# Altium PCB wing2.PcbDoc
Units mil, origin at the board's own origin, x right, y up, seen from the top; angles counter-clockwise.
Board outline 1004.25 x 1375 mil, 4 copper layers (Top Layer, Vertical, Horizontal, Bottom Layer), stack 30.634 mil thick; 79 components, 67 nets, 337 pads, 87 vias.
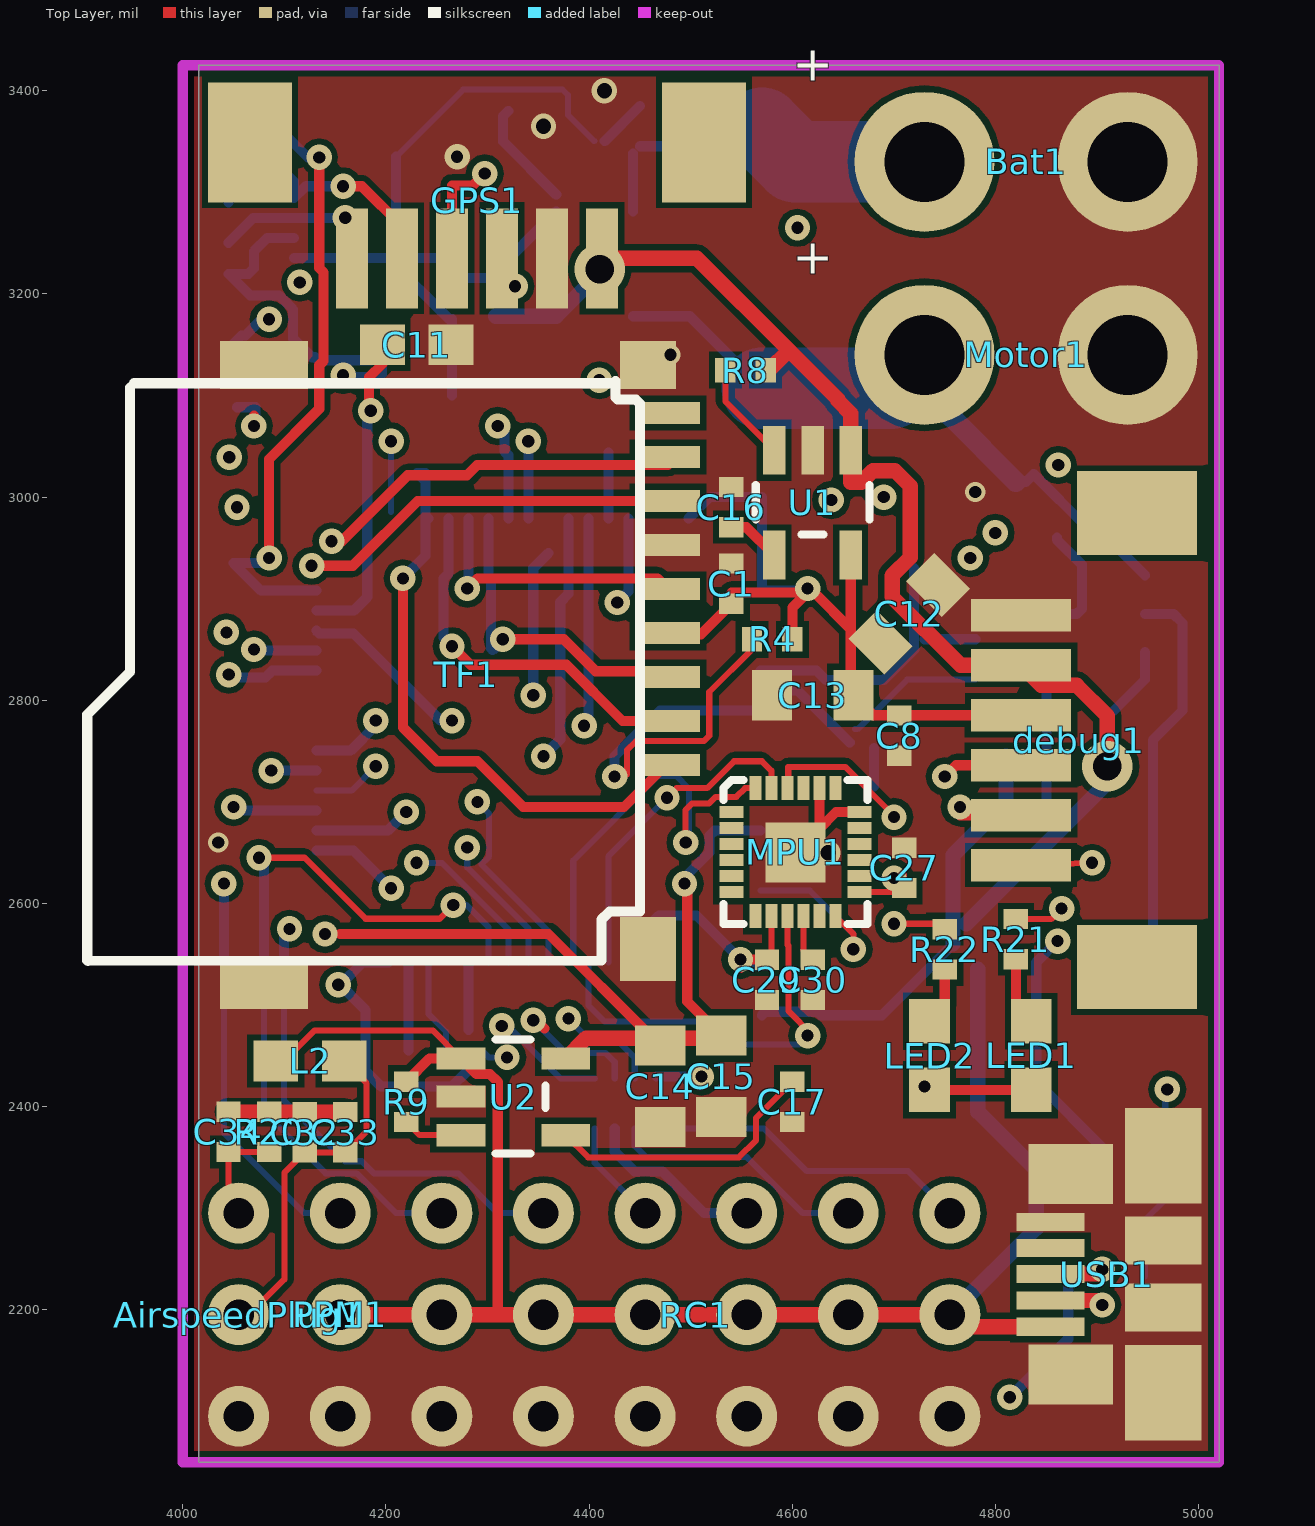
[diagram p0: Top Layer view]
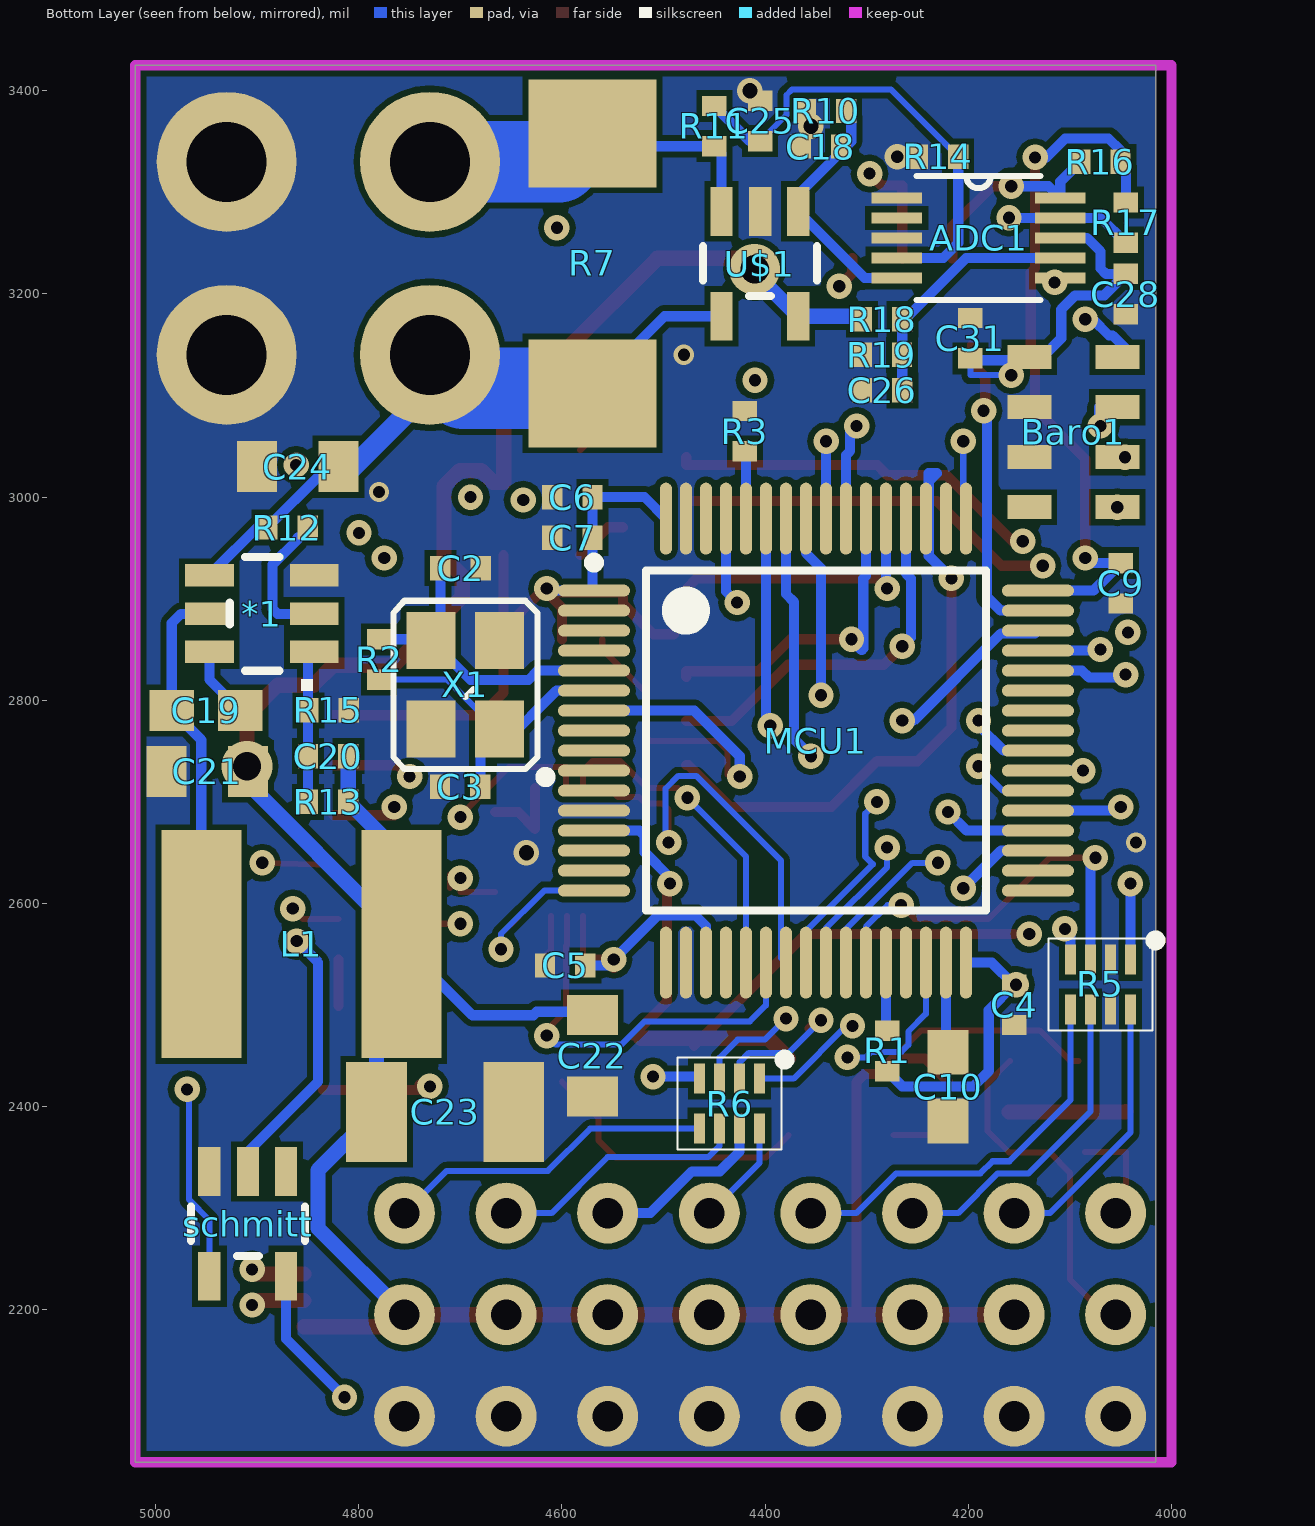
[diagram p1: Bottom Layer view, seen from below]
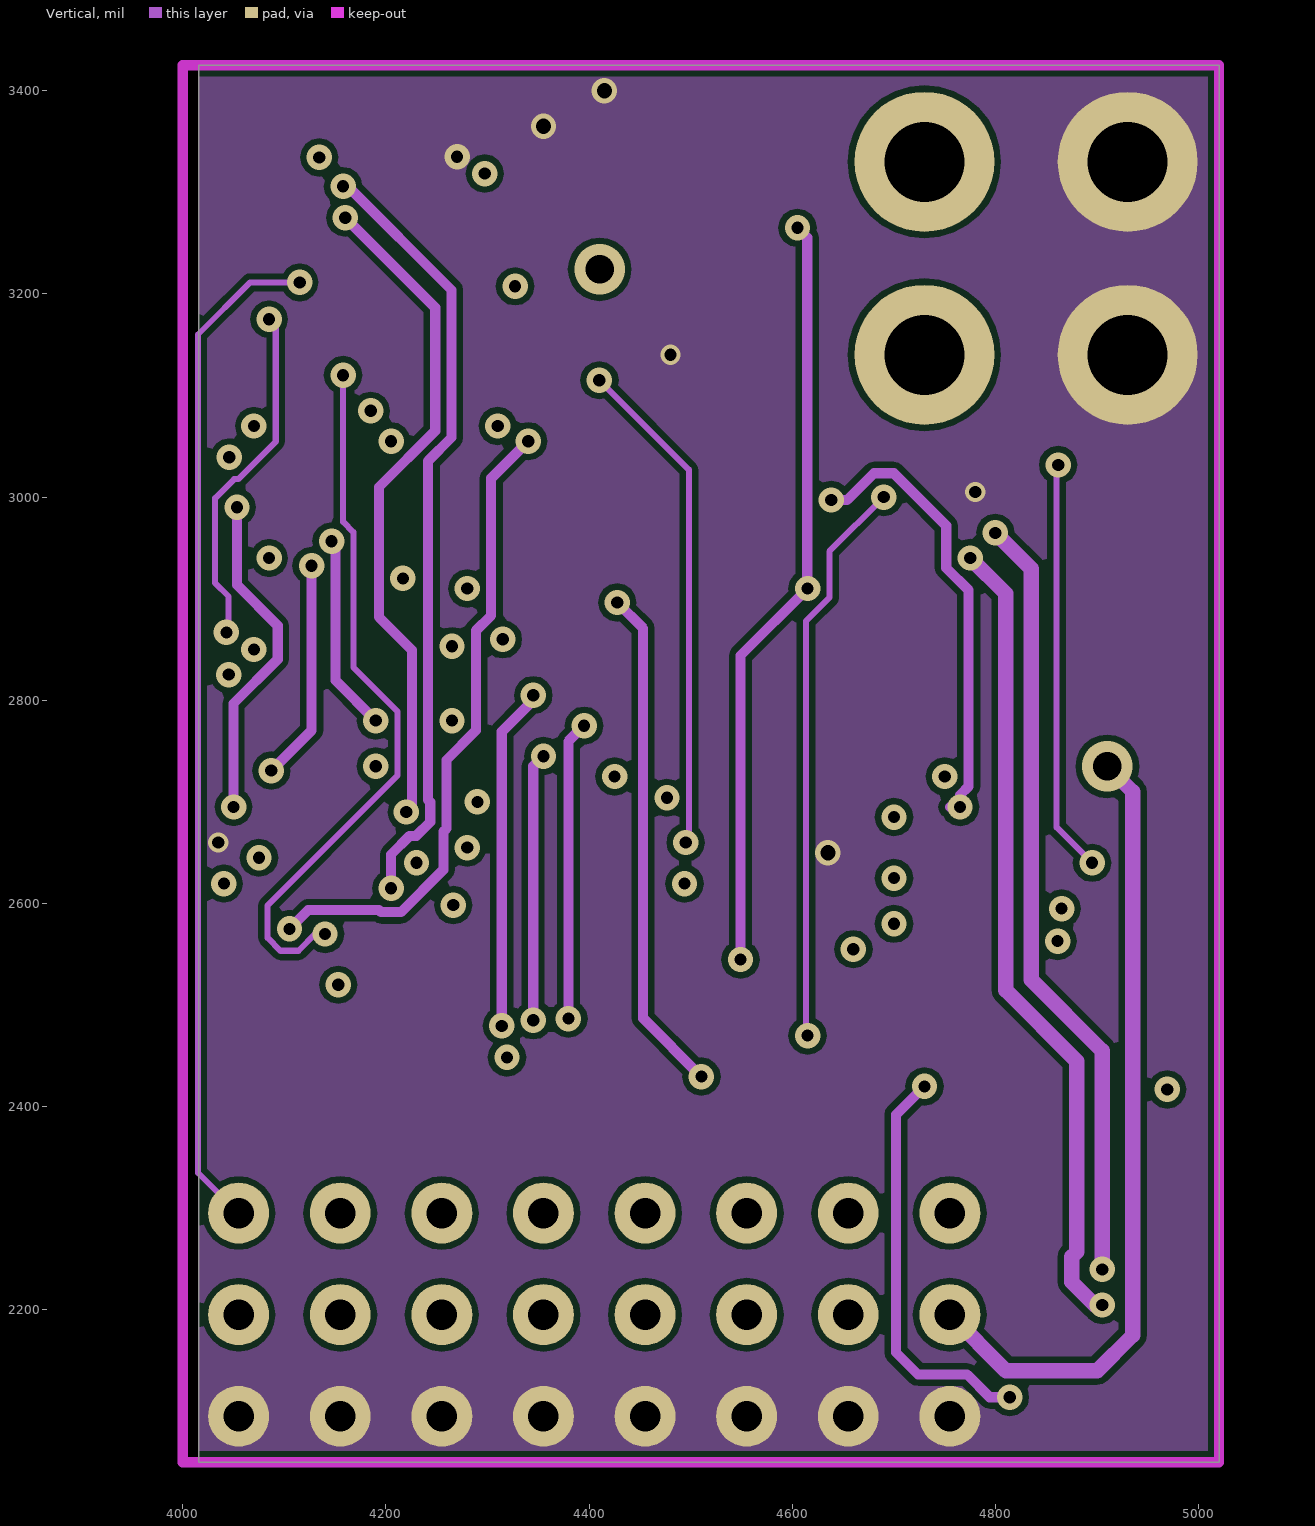
[diagram p2: Vertical]
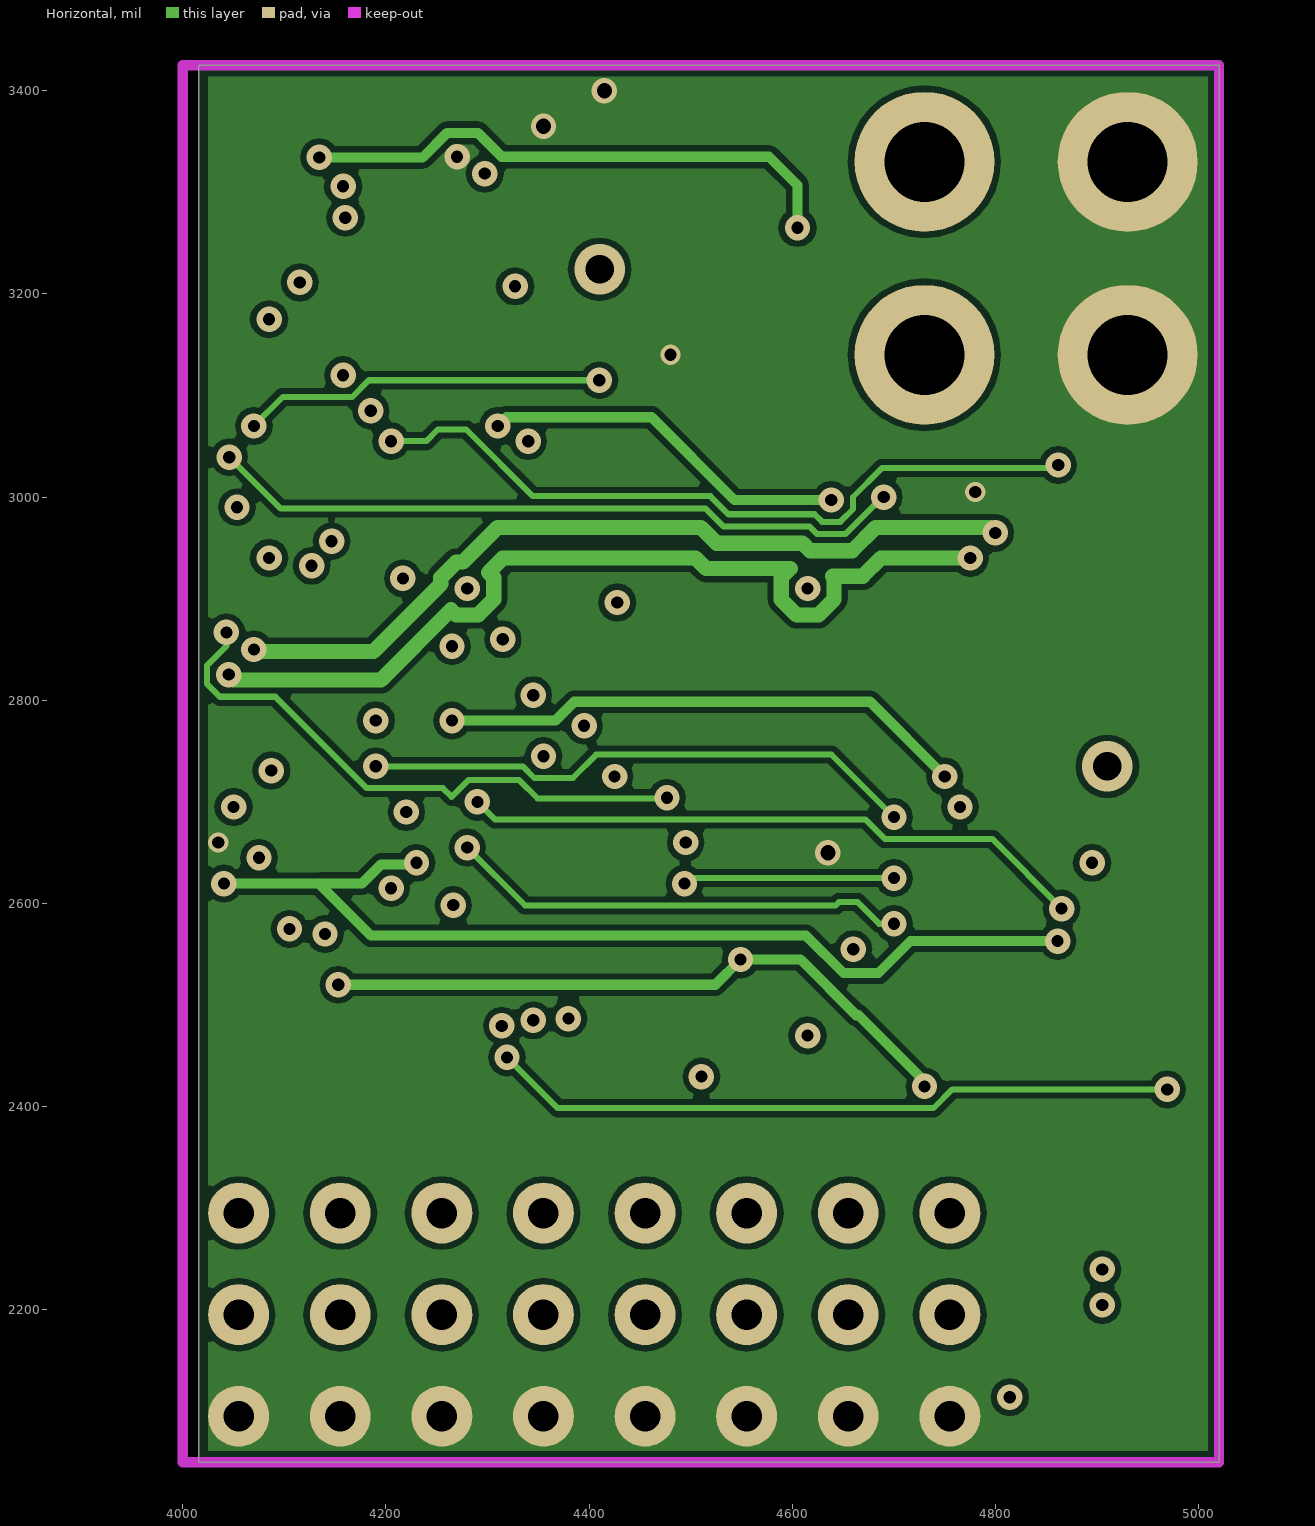
[diagram p3: Horizontal]

## Layer stack, top to bottom
Top Solder: solder mask 0.4, Solder Resist, Dk 3.5
Top Layer: signal copper 1.4
Dielectric 1: core 10, FR-4, Dk 4.2
Vertical: signal copper 1.417
Dielectric 3: prepreg 5, Dk 4.2
Horizontal: signal copper 1.417
Dielectric 2: core 10, Dk 4.2
Bottom Layer: signal copper 1.4
Bottom Solder: solder mask 0.4, Solder Resist, Dk 3.5

## Board outline
4015.75,2050 4015.75,3425 5020,3425 5020,2050

## Design rules (kind name [scope] priority, off if disabled: settings)
Clearance [All] p1: gap=6
DiffPairsRouting [All] p1: maxlimit=10 minlimit=10 mostfreqgap=10 toplayer_minwidth=6 toplayer_maxwidth=15 toplayer_prefwidth=15 midlayer1_minwidth=6 midlayer1_maxwidth=15 midlayer1_prefwidth=15 midlayer2_minwidth=6 midlayer2_maxwidth=15 midlayer2_prefwidth=15 bottomlayer_minwidth=6 bottomlayer_maxwidth=15 bottomlayer_prefwidth=15 maxuncoupledlength=500
MinimumSolderMaskSliver [All] p1 off: minsoldermaskwidth=10
PolygonConnect [All] p1: connectstyle=Direct reliefconductorwidth=10 reliefentries=4 polygonreliefangle="90 Angle" airgapwidth=10
RoomDefinition sensor [InComponentClass('sensor')] p1 off: confinementstyle=ConfineIn formatcopy=TRUE lockcomponents=FALSE outline 0,0 2000,0 2000,1000 0,1000
RoomDefinition power [InComponentClass('power')] p2 off: confinementstyle=ConfineIn formatcopy=TRUE lockcomponents=FALSE outline 0,0 2000,0 2000,1000 0,1000
RoomDefinition mcu [InComponentClass('mcu')] p3 off: confinementstyle=ConfineIn formatcopy=TRUE lockcomponents=FALSE outline 0,0 2000,0 2000,1000 0,1000
RoutingVias [All] p1: holewidth=12 width=25 viastyle="Through Hole" minholewidth=12 minwidth=25 maxholewidth=28 maxwidth=200
SilkToBoardRegionClearance [All] p1 off:
SilkToSilkClearance [All] p1 off: silktosilkclearance=10
SilkToSolderMaskClearance [IsPad] p1 off: minsilkscreentomaskgap=10 clearancetoexposedcopper=TRUE
SolderMaskExpansion [All] p1: expansion=4
UnpouredPolygon [All] p1: allowunpoured=FALSE
Width [All] p1: maxlimit=85 minlimit=6 preferedwidth=6
24 further rules are at their usual default settings.

## Classes and differential pairs
component class mcu: C1 C2 C3 C4 C5 C6 C7 C8 C9 C10 C11 debug1 LED1 LED2 MCU1 PPM1 R1 R2 R3 R4 R5 R6 R21 R22 RC1 schmitt TF1 USB1 X1
component class power: *1 Bat1 C12 C13 C14 C15 C16 C17 C18 C19 C20 C21 C22 C23 C24 C25 L1 Motor1 R7 R8 R9 R10 R11 R12 R13 R14 R15 U1 U2 U$1
component class sensor: ADC1 AirspeedPlug1 Baro1 C26 C27 C28 C29 C30 C31 C32 C33 C34 GPS1 L2 MPU1 R16 R17 R18 R19 R20
differential pair USB: +USB_P -USB_N

## Components (designator, comment, footprint, x,y, rotation, side; value= is the part's Value field where it differs from the comment)
*1 "SY8105" SOT23-6 4895,2885 r90 bottom
ADC1 "ADS1115_10VSSOP" 10VSSOP 4190,3255 r180 bottom
AirspeedPlug1 "AirspeedPlug" ServoConnector 4055,2095.32 r90 top
Baro1 "MS5611" MS5611 4140,2990 r180 bottom
Bat1 "Battery_AWG12" BATTERY_AWG12 4830,3330 r0 top
C1 "0.1uF" 0402 4540,2915 r270 top
C2 "22pF" 0402 4700,2930 r180 bottom
C3 "22pF" 0402 4700,2715 r0 bottom
C4 "0.1uF * 6" 0402 4155,2500 r90 bottom
C5 "1n" 0402 4597,2539 r180 bottom
C6 "1n" 0402 4590,3000 r180 bottom
C7 "1n" 0402 4590,2960 r180 bottom
C8 "1n" 0402 4705,2765 r90 top
C9 "1n" 0402 4050,2915 r90 bottom
C10 "2.2uF" 0603 4220,2420 r270 bottom
C11 "2.2uF" 0603 4230,3150 r0 top
C12 "22uF" 0805 4715,2885 r45 top
C13 "22uF" 0805 4620,2805 r180 top
C14 "22uF" 0805 4470,2420 r270 top
C15 "22uF" 0805 4530,2430 r270 top
C16 "0.1uf" 0402 4540,2990 r90 top
C17 "0.1uF" 0402 4600,2405 r270 top
C18 "2.2uF\" 0402 4345,3345 r0 bottom
C19 "0.1uF" 0603 4950,2790 r0 bottom
C20 "47pF" 0402 4830,2745 r0 bottom
C21 "22uF" 0805 4949,2730 r0 bottom
C22 "22uF" 0805 4570,2450 r270 bottom
C23 "100uF" 1210 4715,2395 r180 bottom
C24 "10uF" 0805 4860,3030 r0 bottom
C25 "47nF" 0402 4405,3370 r90 bottom
C26 "0.1uF" 0402 4285,3105 r180 bottom
C27 "0.1uF" 0402 4710,2635 r90 top
C28 "0.1uF" 0402 4045,3200 r270 bottom
C29 "10nF" 0402 4575,2525 r270 top
C30 "0.1uF" 0402 4620,2525 r270 top
C31 "0.1uF" 0402 4198,3156.32 r90 bottom
C32 "1uF" 0402 4120,2375 r270 top
C33 "10nF" 0402 4160,2375 r270 top
C34 "470pF" 0402 4045,2375 r90 top
debug1 "debug" WFRSM125 4825,2785.32 r90 top
GPS1 "GPS" WFRSM125 4265,3235 r180 top
L1 "Inductor" L6028/L6045 4955,2560 r180 bottom
L2 "Inductor" 0603 4125,2445 r0 top
LED1 "LED0" 0603 4835,2450 r90 top
LED2 "LED0" 0603 4735,2450 r90 top
MCU1 "STM32F103R8T6" LQFP64_N 4350,2760.32 r180 bottom
Motor1 "Battery_AWG12" BATTERY_AWG12 4830,3140 r0 top
MPU1 "MPU9250" MPU9250 4540,2690 r0 top
PPM1 "PPMIn" ServoConnector 4155,2095.32 r90 top
R1 "10k" 0402 4280,2455 r270 bottom
R2 "" 0402 4780,2840 r90 bottom
R3 "10k" 0402 4420,3065 r270 bottom
R4 "10k" 0402 4580,2860 r0 top
R5 "Res*4" 0402X4 4070,2520.32 r270 bottom
R6 "Res*4" 0402X4 4435,2403 r270 bottom
R7 "10mΩ,1%" 2512 4570,3230 r270 bottom
R8 "10k" 0402 4554,3125 r180 top
R9 "10k" 0402 4220,2405 r270 top
R10 "110k,1%" 0402 4340,3380 r0 bottom
R11 "150k,1%" 0402 4450,3365 r90 bottom
R12 "10k" 0402 4870,2970 r0 bottom
R13 "100k,1%" 0402 4830,2700 r0 bottom
R14 "50k,1%" 0402 4230,3335 r180 bottom
R15 "13.7k,1%" 0402 4830,2790 r180 bottom
R16 "4.7k" 0402 4070,3330 r0 bottom
R17 "4.7k" 0402 4045,3270 r90 bottom
R18 "4.7k,1%" 0402 4285,3175 r180 bottom
R19 "4.7k,1%" 0402 4285,3140 r0 bottom
R20 "" 0402 4085,2375 r90 top
R21 "10k" 0402 4820,2565 r270 top
R22 "10k" 0402 4750,2555 r270 top
RC1 "RC" 6P 4455,2095.32 r90 top
schmitt "schmitt_sot23-5" SOT23-5 4909,2285 r0 bottom
TF1 "TF" TF 4080,3130 r270 top
U1 "V_REG_LDOSMD" SOT23-5 4620,2995 r180 top
U2 "V_REG_LDOSMD" SOT23-5 4325,2410 r270 top
U$1 "INA169" SOT23-5 4405,3230 r0 bottom
USB1 "USB Micro Type B" MOLEX-47346-0001 4965,2235.32 r180 top
X1 "8mhz" OSCILLATOR-3.2X2.5 4695,2815 r90 bottom

## Footprints (in the part's own frame and the unit in brackets; to place one, negate y for a bottom-side part, rotate by r counter-clockwise, add the part's x,y. Pads: shape width x height; smd on the part's side, far side on the other; paste and mask are expansions set on the pad)
6P [mil]
  round 60 hole 30: 1(200,200) 2(200,100) 3(200,0) 4(200,-100) 5(200,-200) 5V(100,200) 5V(100,-100) 5V(100,0) 5V(100,100) 5V(100,-300) 5V(100,-200) 6(200,-300) GND(0,200) GND(0,100) GND(0,0) GND(0,-100) GND(0,-200) GND(0,-300)
10VSSOP [mil]
  rect 50x11 smd: 1(-80.5,39.37) 2(-80.5,19.68) 3(-80.5,0) 4(-80.5,-19.68) 5(-80.5,-39.37) 6(80.5,-39.37) 7(80.5,-19.68) 8(80.5,0) 9(80.5,19.68) 10(80.5,39.37)
  silkscreen extent -61,-61 61,61
0402 [mil] "0402-RES"
  rect 20x24 smd: 1(-19.68,0) 2(20,0)
0402X4 [mm]
  rect 0.75x0.28 smd: 1(-0.625,0.75) 2(-0.625,0.25) 3(-0.625,-0.25) 4(-0.625,-0.75) 5(0.625,-0.75) 6(0.625,-0.25) 7(0.625,0.25) 8(0.625,0.75)
  silkscreen extent -1.22,-1.3 1.15,1.5
0603 [mil] "0603-RES"
  rect 44x40 smd: 1(-33.46,0) 2(34,0)
0805 [mil]
  rect 39.37x50 smd: 1(-40,0) 2(40,0)
  body extent -50,-30 50,30, height 31
1210 [mm]
  rect 1.52x2.5 smd: 1(-1.715,0) 2(1.715,0)
2512 [mm]
  rect 2.7x3.2 smd: 1(-3.25,0) 2(3.25,0)
BATTERY_AWG12 [mm]
  round 3.5 hole 2: 1(-2.54,0) 2(2.54,0)
L6028/L6045 [mm]
  rect 2x5.7 smd: 1(0,0) 2(5,0)
LQFP64_N [mm]
  oval 1.8x0.3 smd: 1(-5.55,3.75) 2(-5.55,3.25) 3(-5.55,2.75) 4(-5.55,2.25) 5(-5.55,1.75) 6(-5.55,1.25) 7(-5.55,0.75) 8(-5.55,0.25) 9(-5.55,-0.25) 10(-5.55,-0.75) 11(-5.55,-1.25) 12(-5.55,-1.75) 13(-5.55,-2.25) 14(-5.55,-2.75) 15(-5.55,-3.25) 16(-5.55,-3.75) 33(5.55,-3.75) 34(5.55,-3.25) 35(5.55,-2.75) 36(5.55,-2.25) 37(5.55,-1.75) 38(5.55,-1.25) 39(5.55,-0.75) 40(5.55,-0.25) 41(5.55,0.25) 42(5.55,0.75) 43(5.55,1.25) 44(5.55,1.75) 45(5.55,2.25) 46(5.55,2.75) 47(5.55,3.25) 48(5.55,3.75)
  oval 0.3x1.8 smd: 17(-3.75,-5.55) 18(-3.25,-5.55) 19(-2.75,-5.55) 20(-2.25,-5.55) 21(-1.75,-5.55) 22(-1.25,-5.55) 23(-0.75,-5.55) 24(-0.25,-5.55) 25(0.25,-5.55) 26(0.75,-5.55) 27(1.25,-5.55) 28(1.75,-5.55) 29(2.25,-5.55) 30(2.75,-5.55) 31(3.25,-5.55) 32(3.75,-5.55) 49(3.75,5.55) 50(3.25,5.55) 51(2.75,5.55) 52(2.25,5.55) 53(1.75,5.55) 54(1.25,5.55) 55(0.75,5.55) 56(0.25,5.55) 57(-0.25,5.55) 58(-0.75,5.55) 59(-1.25,5.55) 60(-1.75,5.55) 61(-2.25,5.55) 62(-2.75,5.55) 63(-3.25,5.55) 64(-3.75,5.55)
  silkscreen extent -5.68,-4.25 4.25,4.57
MOLEX-47346-0001 [mil] "MOLEX-47346-0001"
  rect 67x18 smd: 1(111,52) 2(111,26) 3(111,0) 4(111,-25.59) 5(111,-51.18)
  rect 75x94 smd: 5(0,117) 5(0,-116.14)
  rect 75x47 smd: 5(0,33) 5(0,-32.97)
  rect 83x59 smd: 5(91,99) 5(91,-98.43)
MPU9250 [mm]
  rect 1.5x1.5 smd: 0(1.6,-1.016)
  rect 0.6x0.3 smd: 1(0,0) 2(0,-0.4) 3(0,-0.8) 4(0,-1.2) 5(0,-1.6) 6(0,-2) 13(3.2,-2) 14(3.2,-1.6) 15(3.2,-1.2) 16(3.2,-0.8) 17(3.2,-0.4) 18(3.2,0)
  rect 0.3x0.6 smd: 7(0.6,-2.6) 8(1,-2.6) 9(1.4,-2.6) 10(1.8,-2.6) 11(2.2,-2.6) 12(2.6,-2.6) 19(2.6,0.6) 20(2.2,0.6) 21(1.8,0.6) 22(1.4,0.6) 23(1,0.6) 24(0.6,0.6)
  silkscreen extent -0.2,-2.8 3.4,0.8, body extent 0.1,-2.51 3.1,0.48, height 1
MS5611 [mm]
  rect 1.1x0.6 smd: 1(0,3.75) 2(0,2.5) 3(0,1.25) 4(0,0) 5(2.2,0) 6(2.2,1.25) 7(2.2,2.5) 8(2.2,3.75)
  body extent -0.51,-0.51 2.67,4.32, height 1
OSCILLATOR-3.2X2.5 [mil] "OSCILLATOR-3.2X2.5"
  rect 56x48 smd: 1(-43.31,-33.46) 2(44,-33.46) 3(44,34) 4(-43.31,34)
  silkscreen extent -95,-83 83,71
ServoConnector [mil]
  round 60 hole 30: 1(0,0) 2(100,0) 3(200,0)
SOT23-5 [mil] "SOT23-5"
  rect 22x48 smd: 1(-37.4,-51.18) 2(0,-51.18) 3(38,-51.18) 4(38,52) 5(-37.4,52)
  silkscreen extent -56,-17 56,32
SOT23-6 [mil] "SOT23-5"
  rect 22x48 smd: 1(-37.4,-51.19) 2(0,-51.19) 3(38,-51.19) 4(38,52) 5(0,52.01) 6(-37.4,52)
  silkscreen extent -76,-50 56,32
TF [mm]
  rect 0.55x1.6 smd: 1(10,10.1) 2(8.9,10.1) 3(7.8,10.1) 4(6.7,10.1) 5(5.6,10.1) 6(4.5,10.1) 7(3.4,10.1) 8(2.3,10.1) 9(1.2,10.1)
  rect 1.2x1.4 smd: SHELL(0,9.6)
  rect 1.2x2.2 smd: SHELL(0,0) SHELL(15.5,0)
  rect 1.6x1.4 smd: SHELL(14.6,9.6)
  silkscreen extent 0.41,-4.42 14.9,9.4
WFRSM125 [mm]
  rect 0.81x2.5 smd: 1(-3.75,0) 2(-2.5,0) 3(-1.25,0) 4(0,0) 5(1.25,0) 6(2.5,0)
  rect 2.1x3 smd: shell(-6.3,-2.9) shell(5.05,-2.9)
  body extent -6.79,-3.82 5.46,0.38, height 3.4

## Part data
C1 C2 C3 C4 C5 C6 C7 C8 C9 C10 C11 C12 C13 C14 C15 C16 C17 C19 C20 C21 C26 C27 C28 C29 C30 C31 C32 C33 C34: library part CAP0402-CAP, "<b>Capacitor</b> / Standard 0603 ceramic capacitor, and 0.1\" leaded capacitor."
C18 C22 C23 C24 C25: library part C-USC0402, "<B>CAPACITOR</B>, American symbol"
LED1 LED2: "Typical INFRARED GaAs LED"
MCU1: "STM32 ARM-based 32-bit MCU with 64 Kbytes Flash, 64-pin LQFP, Industrial Temperature"
R1 R2 R3 R4 R16 R17 R18 R19 R20 R21 R22: library part Res2, "Resistor"
R5 R6: "Resistor"
R7: library part CSS2725FTL250
R8 R9 R10 R11 R12 R13 R14 R15: library part RESISTOR0402-RES, "<b>Resistor</b> / Basic schematic elements and footprints for 0603, 1206, and PTH resistors."
U1 U2: "<b>Voltage Regulator LDO</b> / Standard 150mA LDO voltage regulator in SOT-23 layout. Micrel part MIC5205. BP (by-pass) pin is used to lower output noise with 470pF cap."
USB1: library part USB_Micro_TypeB, "Connector SMD USB Micro Type B middle mount"
X1: library part OSCILLATOR-3.2X2.5, "Crystal Oscillator in 3.2x2.5 SMD"

## Via types
v1: diameter 25, hole 12, Top Layer to Bottom Layer, 79 vias
v2: diameter 20, hole 12, Top Layer to Bottom Layer, 3 vias
v3: diameter 25, hole 15, Top Layer to Bottom Layer, 3 vias
v4: diameter 50, hole 28, Top Layer to Bottom Layer, 2 vias

## Nets (pads, with @x,y where several pads share a name; then routed paths per layer and width w, separated by ;. In a path a pad name is that pad's centre, name@x,y a point inside that pad or via, vN(x,y) a via of type N, cw(c..) or ccw(c..) an arc to the next point about the centre after c; other vN are vias at no path point)
3.3A: ADC1.8 Baro1.1 C14.1 C15.1 C27.1 C28.1 C31.1 MCU1.13 MPU1.13 U2.5 | length 2094.3
  Top Layer w6: v1(4140,2570) 4155,2570 ; MPU1.13 C27.1@4700,2611.26 ; v1(4700,2625) 4700,2626 4702.31,2628.31 4710,2628.31 C27.1
  Top Layer w10: 4155,2570 4360,2570 4462.6,2467.4 C14.1 ; v1(4493.78,2619.53) 4496.51,2616.8 4496.51,2503.49 C15.1
  Top Layer w15: U2.5 4397,2467.4 4462.6,2467.4 C15.1@4522.4,2467.4
  Vertical w6: v1(4140,2570) 4130.41,2570 4113.91,2553.5 4096.09,2553.5 4083.5,2566.09 4083.5,2598.09 4211.5,2726.09 4211.5,2788.91 4168,2832.41 4168,2965.41 4157.81,2975.6 v1(4157.81,3120)
  Horizontal w6: v1@4499.26,2625 v1(4700,2625)
  Bottom Layer w6: v1(4157.81,3120) 4198,3120 C31.1
  Bottom Layer w10: ADC1.8 4083.13,3255 4070,3241.87 4070,3225 4064.68,3219.68 C28.1 4066.18,3198.5 4094.73,3198.5 4108.5,3184.73 4108.5,3156.18 4127.05,3137.64 Baro1.1@4130,3137.64 ; Baro1.1@4132.95,3134.68 4185,3134.68 ; v1(4493.78,2619.53) 4493.78,2625.55 4518.5,2650.27 4518.5,2666.68 4523.55,2671.73 MCU1.13
3.3D: C1.2 C4.2 C5.2 C6.2 C7.2 C8.2 C9.2 C12.1 C13.1 C29.1 debug1.4 LED1.1 LED2.1 MCU1.1 MCU1.19 MCU1.32 MCU1.48 MCU1.64 MPU1.8 R1.2 R4.2 R16.1 R17.2 schmitt.5 TF1.4 U1.5 | length 4602.5
  Top Layer w6: C29.1 4579.37,2549.05 MPU1.8
  Top Layer w10: v1@4085.93,2940 v1(4085,2940) 4085,3037.51 4134.31,3086.82 4134.31,3110.27 4134.31,3129.73 4138.65,3134.08 4138.65,3221.05 4134.31,3225.39 v1(4134.31,3334.31) ; TF1.4@4490,2865 4510,2865 C1.2 4540,2906 4615,2906 4600,2891 R4.2 ; v1@4548.99,2536.7 v1(4548.99,2544.83) C29.1@4574.86,2544.83 ; v1@4621.4,2906 4657.4,2870 ; U1.5 4657.4,2870 ; v1(4730,2420) 4731.54,2421.54 4740,2421.54 LED2.1 LED1.1 ; debug1.4 4679.69,2785.32 C13.1 4657.4,2807.6 4657.4,2870
  Vertical w10: v1(4548.99,2544.83) 4548.99,2843.99 v1(4615,2910) 4614.68,2910.32 4614.68,3255.32 v1(4605,3265) ; v1(4730,2420) 4702,2392 4702,2158 4723.69,2136.32 4771.98,2136.32 4794.3,2114 v1(4814,2114)
  Horizontal w10: v1(4134.31,3334.31) 4236.07,3334.31 4260.27,3358.5 4290.31,3358.5 4313.81,3335 4577,3335 4605,3307 v1(4605,3265) ; v1(4153,2520) 4524.16,2520 v1(4548.99,2544.83) 4608.1,2544.83 4662.93,2490 4665,2490 4735,2420 v1(4730,2420)
  Bottom Layer w10: R17.2 R16.1@4045,3325.32 ; R16.1 4050.32,3341.32 4062,3353 4104.56,3353 4123.25,3334.31 v1(4134.31,3334.31) ; v1(4085,2940) 4080,2935 C9.2 4077.05,2907.95 MCU1.48 ; v1(4153,2520) C4.2 ; MCU1.32 4176.81,2541.81 C4.2 ; R1.2 4265,2420 4195,2420 4180,2435 4180,2495 C4.2 ; MCU1.19 4458.27,2577.91 4468.6,2588.24 4505.57,2588.24 v1(4548.99,2544.83) ; MCU1.64 4518.82,3000 C6.2 C7.2 4570,2909.45 MCU1.1 4612.95,2907.95 v1(4615,2910) ; v1@4554.81,2539 C5.2 ; v1(4814,2114) 4871.6,2171.6 schmitt.5
5V: C20.1 C21.1 C22.1 C23.1 debug1.5 GPS1.1 L1.2 L2.1 PPM1.2 R8.1 R9.1 R13.1 R18.1 RC1.5V U1.1 U2.1 U$1.5 USB1.1 | length 4073.2
  Top Layer w6: L2.1 4099.89,2445 4129.89,2475 4246.22,2475 U2.1
  Top Layer w10: R9.1 4242.72,2447.4 U2.1 4289.22,2432 4302.37,2432 4310,2424.37 4310,2195.32
  Top Layer w15: PPM1.2 4255,2195.32 4310,2195.32 4355,2195.32 4455,2195.32 4555,2195.32 4655,2195.32 RC1.5V@4755,2195.32 ; GPS1.1@4404.21,3224.21 v4(4410.37,3224.21) ; GPS1.1 4506.09,3235 4596.55,3144.55 ; R8.1 4577,3125 4596.55,3144.55 ; 4644.69,3095 4657.4,3082.28 U1.1 4657.4,3014.69 4667.92,3014.69 4679.23,3026 4700.77,3026 4716,3010.77 4716,2940.45 4698.19,2922.63 4698.19,2901.81 4765.47,2834.53 debug1.5 4844.77,2814.76 4879.8,2814.76 4910,2784.56 v4(4910,2735) ; 4644.69,3096.41 4596.55,3144.55 ; RC1.5V@4767,2183.32 USB1.1
  Vertical w15: RC1.5V@4755,2195.32 4810.31,2140 4900,2140 4935,2175 4935,2710 v4(4910,2735)
  Bottom Layer w10: C22.1 4573.5,2493.5 4624.73,2493.5 4628.23,2490 4688.15,2490 L1.2
  Bottom Layer w15: R18.1@4307.69,3178 U$1.5 4410.37,3220.77 v4(4410.37,3224.21) ; RC1.5V@4755,2195.32 4840,2280.32 4840,2337.52 C23.1 L1.2@4782.52,2535.63 ; L1.2 4758.15,2647.83 R13.1 C20.1 ; L1.2@4771.09,2580 C21.1@4910,2718.91
GND: *1.3 ADC1.1 ADC1.3 AirspeedPlug1.1 Baro1.2 Baro1.3 Bat1.2 C1.1 C2.2 C3.2 C4.1 C5.1 C6.1 C7.1 C8.1 C9.1 C10.2 C11.2 C12.2 C13.2 C14.2 C15.2 C16.2 C17.2 C18.2 C21.2 C22.2 C23.2 C24.2 C25.2 C26.1 C27.2 C28.2 C29.2 C30.2 C31.2 C32.1 C33.1 C34.2 debug1.6 GPS1.2 MCU1.12 MCU1.18 MCU1.63 Motor1.2 MPU1.0 MPU1.18 MPU1.20 PPM1.1 R3.1 R5.2 R5.7 R10.2 R14.1 R15.2 R19.2 R20.2 RC1.GND schmitt.3 TF1.6 TF1.SHELL U1.2 U2.2 U$1.2 USB1.5 X1.2 X1.4 | length 201.3
  Top Layer w10: MPU1.20 4626.61,2673.61 4643,2690 MPU1.18
  Top Layer w15: C34.2 4045.32,2394.68 C32.1 C33.1
  other v1: 4270,3335
  other v2: 4035,2660 4780,3005 4480,3140
  other v3: 4635,2650 4355,3365 4415,3400
Net*1_1: *1.1 C20.2 R13.2 R15.1 | length 141.4
  Bottom Layer w10: R13.2 C20.2 *1.1@4850,2841.41
Net*1_2: *1.2 R12.1 | length 137.3
  Bottom Layer w10: *1.2@4830,2885 *1.2 4880,2885 4885,2890 4885,2933.32 4860.31,2958 4860.31,2960
Net*1_5: *1.5 C19.2 L1.1 | length 368.7
  Bottom Layer w10: *1.5 4975,2885 4984,2876 C19.2 4955,2761 L1.1
Net*1_6: *1.6 C19.1 | length 70.2
  Bottom Layer w10: C19.1 4947,2820.46 *1.6
NetADC1_4: ADC1.4 C25.1 R11.2 R14.2 | length 455.3
  Bottom Layer w6: R14.2 4276,3401 4373.73,3401 4379,3395.73 4379,3376.32 C25.1
  Bottom Layer w10: R14.2 4210,3250 4224.69,3235.32 ADC1.4 ; C25.1@4415.31,3350.32 R11.2
NetADC1_5: ADC1.5 C18.1 R10.1 U$1.1 | length 230.3
  Bottom Layer w10: ADC1.5 4302.04,3215.63 U$1.1 ; R10.1 4315.31,3375 4315.31,3350 U$1.1@4367.6,3297.72
NetADC1_6: ADC1.6 AirspeedPlug1.3 C34.1 R20.1 | length 1121.6
  Top Layer w6: AirspeedPlug1.3@4060,2290 4045,2305 C34.1 R20.1
  Vertical w6: AirspeedPlug1.3@4060,2290 4015,2335 4015,3160 4066.32,3211.32 v1(4115.15,3211.32)
NetADC1_7: ADC1.7 C26.2 R18.2 R19.1 | length 255.5
  Bottom Layer w10: ADC1.7 4202.06,3235.32 4262.37,3175 R18.2 C26.2@4265,3100
NetADC1_9: ADC1.9 GPS1.6 MCU1.36 R17.1 | length 881.5
  Vertical w10: v1(4160,3275) 4248.5,3186.5 4248.5,3065.27 4193.16,3009.93 4193.16,2881.84 4225.5,2849.5 4225.5,2695.5 v1(4220,2690)
  Bottom Layer w10: R17.1 4069.37,3274.68 ADC1.9 4159.69,3274.68 v1(4160,3275) ; MCU1.36 4201.73,2671.73 v1(4220,2690)
NetADC1_10: ADC1.10 GPS1.5 MCU1.35 R16.2 | length 1059.4
  Top Layer w10: v1(4157.81,3306) 4176.29,3306 4215.79,3266.5 GPS1.5
  Vertical w10: v1(4157.81,3306) 4162.23,3306 4264.5,3203.73 4264.5,3058.64 4241.5,3035.64 4241.5,2701.73 4243.5,2699.73 4243.5,2680.27 4229.73,2666.5 4223.27,2666.5 4205,2648.23 v1(4205,2615)
  Bottom Layer w10: R16.2 4109.5,3310.5 ADC1.10 4121.13,3306 v1(4157.81,3306) ; MCU1.35 4167.95,2652.05 v1(4205,2615)
NetAirspeedPlug1_2: AirspeedPlug1.2 C32.2 C33.2 L2.2 | length 337.7
  Top Layer w6: AirspeedPlug1.2@4060,2190 4100,2230 4100,2335 C32.2 C33.2 4181,2376 4181,2423 L2.2
NetBaro1_5: Baro1.5 MCU1.37 | length 412.6
  Vertical w10: v1(4050,2695) 4050,2796.77 4093.5,2840.27 4093.5,2873.5 4053.39,2913.61 v1(4053.39,2990)
  Bottom Layer w10: v1(4050,2695) 4053.58,2691.42 MCU1.37
NetBaro1_6: Baro1.6 MCU1.22 MPU1.9 | length 1678.8
  Top Layer w6: MPU1.9 4595.12,2559.29 4596,2558.41 4596,2494.27 4620.27,2470 v1(4615,2470)
  Vertical w6: v1(4615,2470) 4613.5,2471.5 4613.5,2878.09 4636.5,2901.09 4636.5,2946.5 v1(4690,3000)
  Horizontal w6: v1(4045.79,3039.21) 4096.1,2988.9 4514.33,2988.9 4532.1,2971.13 4616.81,2971.13 4624.31,2963.63 4652.06,2963.63 4688.43,3000 v1(4690,3000)
  Bottom Layer w6: MCU1.22 4399.21,2499.79 4415,2484 4518.59,2484 4541.27,2461.31 4606.31,2461.31 v1(4615,2470) v1@4607.41,2470
  Bottom Layer w10: v1(4045.79,3039.21) Baro1.6
NetBaro1_7: Baro1.7 MCU1.23 MPU1.24 | length 1318.3
  Top Layer w6: v1(4495,2660) 4495,2692.04 4501.48,2698.52 4518.08,2698.52 4524.46,2704.91 4544.91,2704.91 4553.62,2713.62 MPU1.24
  Top Layer w10: v1(4070,3070) v1@4070,3080
  Vertical w6: v1(4410,3115) 4498.08,3026.92 4498.08,2663.08 v1(4495,2660)
  Horizontal w6: v1(4070,3070) 4098.5,3098.5 4166.71,3098.5 4183.21,3115 v1(4410,3115)
  Bottom Layer w6: MCU1.23 4384.31,2546.59 4384.31,2642.16 4467.67,2725.52 4485.48,2725.52 4498.08,2712.93 4498.08,2663.08 v1(4495,2660)
  Bottom Layer w10: Baro1.7 4071.57,3088.43 4071.57,3071.57 v1(4070,3070)
NetBaro1_8: Baro1.8 MCU1.21 MPU1.23 | length 1295.4
  Top Layer w6: v1(4476.58,2704.02) 4486.07,2713.52 4516.1,2713.52 4542.59,2740 4570,2740 4579.37,2730.63 MPU1.23
  Vertical w6: v1(4042.97,2866.82) 4045,2868.84 4045,2902.2 4031.89,2915.32 4031.89,2998.91 4050.69,3017.71 4054.69,3017.71 4091.5,3054.52 v1@4091.5,3168.5
  Horizontal w6: v1(4042.97,2866.82) 4042.97,2853.38 4023.75,2834.16 4023.75,2816.35 4036.6,2803.5 4091.09,2803.5 4181.09,2713.5 4256.09,2713.5 4264.59,2705 4281.09,2721.5 4331.12,2721.5 4349.12,2703.5 4476.06,2703.5 v1(4476.58,2704.02)
  Bottom Layer w6: MCU1.21 4418.9,2646.34 v1(4476.58,2704.02)
  Bottom Layer w10: Baro1.8 4045,3146.02 4057.98,3159 4061.56,3159 4077.56,3175 v1(4085,3175)
NetC2_1: C2.1 MCU1.5 R2.2 X1.3 | length 297.5
  Bottom Layer w10: MCU1.5 4623.77,2829.21 4632.98,2820 4690.09,2820 X1.3@4720.05,2849.95 ; X1.3@4719.69,2850.32 C2.1 ; X1.3@4730,2860 R2.2
NetC3_1: C3.1 MCU1.6 R2.1 X1.1 | length 285.7
  Bottom Layer w6: X1.1 4664.27,2771.69 4712.89,2820.32 R2.1
  Bottom Layer w10: MCU1.6 4605.47,2809.53 X1.1@4656.54,2758.46 ; C3.1 X1.1@4680.31,2752.91
NetC10_1: C10.1 MCU1.31 | length 86.3
  Bottom Layer w10: C10.1@4222.05,2455.51 MCU1.31
NetC11_1: C11.1 MCU1.47 | length 311.6
  Top Layer w10: v1(4185,3085) 4183.37,3086.63 4183.37,3117.86 4196.54,3131.03 C11.1
  Bottom Layer w10: MCU1.47 4168.27,2888.27 4181.5,2901.5 4181.5,3081.5 v1(4185,3085)
NetC16_1: C16.1 U1.4 | length 53.3
  Top Layer w10: C16.1 4554.69,2970.32 U1.4
NetC17_1: C17.1 U2.4 | length 276
  Top Layer w6: U2.4 4399,2350 4547.41,2350 4564,2366.59 4564,2388.68 C17.1
NetC30_1: C30.1 MPU1.10 | length 46.7
  Top Layer w6: MPU1.10 4610.87,2553.82 C30.1
Netdebug1_1: debug1.1 MCU1.49 | length 1275.8
  Top Layer w6: debug1.1 v1(4895,2640)
  Vertical w6: v1(4861.62,3031.62) 4860,3030 4860,2675 v1(4895,2640)
  Horizontal w6: v1(4205,3055) 4239.59,3055 4251.09,3066.5 4278.91,3066.5 4344.51,3000.9 4519.3,3000.9 4537.07,2983.13 4621.78,2983.13 4629.28,2975.63 4647.09,2975.63 4659.68,2988.23 4659.68,3000.09 4688.09,3028.5 4858.5,3028.5 v1(4861.62,3031.62)
  Bottom Layer w6: MCU1.49@4205,2985.2 v1(4205,3055)
Netdebug1_2: debug1.2 MCU1.55 | length 974.1
  Top Layer w10: v1(4765,2695) 4765,2686.89 debug1.2
  Vertical w10: v1(4638.18,2997.13) 4653.9,2997.13 4680.27,3023.5 4699.73,3023.5 4751.5,2971.73 4751.5,2930.27 4773.5,2908.27 4773.5,2715.27 4765,2706.77 v1(4765,2695) v1@4755,2695
  Horizontal w10: v1(4310,3070) 4318.5,3078.5 4461.5,3078.5 4542.87,2997.13 v1(4638.18,2997.13)
  Bottom Layer w10: v1(4310,3070) 4316.5,3063.5 4316.5,3045.27 4320.47,3041.29 MCU1.55
Netdebug1_3: debug1.3 MCU1.46 | length 772.9
  Top Layer w10: v1(4750,2725) 4761.1,2736.1 debug1.3
  Horizontal w10: v1(4265,2780) 4356.77,2780 4366.77,2780 4385.27,2798.5 4676.5,2798.5 v1(4750,2725)
  Bottom Layer w10: MCU1.46 4134.28,2865.8 4168.03,2865.8 4253.83,2780 v1(4265,2780)
NetGPS1_3: GPS1.3 | length 32.9
  Top Layer w10: GPS1.3 4314.21,3220.3 v1(4327.08,3207.43)
NetGPS1_4: GPS1.4 | length 108.8
  Top Layer w10: GPS1.4 4265,3306.77 4285.61,3306.77 v1(4297.21,3318.37)
NetLED1_2: LED1.2 R21.2 | length 46
  Top Layer w10: LED1.2@4820,2499 R21.2
NetLED2_2: LED2.2 R22.2 | length 36
  Top Layer w10: LED2.2@4750,2499 R22.2
NetMCU1_7: MCU1.7 R4.1 | length 418.1
  Top Layer w6: v1(4425,2725) 4435,2725 4437.14,2727.14 4437.14,2750.85 4446.07,2759.78 4512.86,2759.78 4518.13,2765.05 4518.13,2808.13 4560.31,2850.32 R4.1
  Bottom Layer w10: v1(4425,2725) 4425,2745 4469.84,2789.84 MCU1.7
NetMCU1_16: MCU1.16 MPU1.12 | length 164.1
  Top Layer w6: MPU1.12 4660,2570 v1(4660,2555)
  Bottom Layer w6: MCU1.16 4617.32,2612.68 4660,2570 v1(4660,2555)
NetMCU1_24: MCU1.24 R21.1 | length 862.4
  Top Layer w6: R21.1 4854.69,2584.68 v1(4865,2595)
  Vertical w6: v1@4865,2593.74 v1(4865,2595)
  Horizontal w6: v1(4290,2700) 4307.48,2682.52 4672.07,2682.52 4691.09,2663.5 4796.5,2663.5 v1(4865,2595)
  Bottom Layer w6: v1(4290,2700) 4301.5,2688.5 4301.5,2646.09 4293.99,2638.59 4359.84,2572.73 MCU1.24
NetMCU1_25: MCU1.25 R22.1 | length 644.3
  Top Layer w6: v1(4700,2580) 4744.69,2580 R22.1
  Horizontal w6: v1(4280,2655) 4336.97,2598.03 4642.62,2598.03 4646.09,2601.5 4663.91,2601.5 4685.41,2580 v1(4700,2580)
  Bottom Layer w6: v1(4280,2655) 4280,2635.61 4340.16,2575.45 MCU1.25
NetMCU1_26: MCU1.26 R5.1 schmitt.2 | length 1462.9
  Horizontal w10: v1(4040.47,2619.53) 4134,2619.53 ; v1@4230,2638.5 4195.27,2638.5 4176.29,2619.53 4134,2619.53 ; v1(4861,2563) 4716.23,2563 4684.73,2531.5 4650.27,2531.5 4613.44,2568.33 4185.2,2568.33 4134,2619.53
  Bottom Layer w6: v1(4230,2640) 4255,2640 4320.47,2574.53 MCU1.26
  Bottom Layer w10: R5.1 v1(4040.47,2619.53) ; v1(4861,2563) 4840,2542 4840,2424.78 4909,2355.78 schmitt.2
NetMCU1_27: MCU1.27 R5.3 | length 411.7
  Top Layer w6: v1(4075,2645) 4120,2645 4180,2585 4252.82,2585 v1(4266.21,2598.39) v1@4259.59,2605
  Bottom Layer w6: v1(4266.21,2598.39) 4279.43,2598.39 4300.79,2577.03 MCU1.27
  Bottom Layer w10: v1(4075,2645) 4079.84,2640.16 R5.3
NetMCU1_28: MCU1.28 R1.1 | length 66
  Bottom Layer w10: R1.1@4281.1,2475.79 MCU1.28
NetMCU1_30: MCU1.30 schmitt.4 | length 1024.9
  Top Layer w6: v1@4318.9,2448.53 v1(4319.08,2448.53)
  Horizontal w6: v1(4319.08,2448.53) 4369.11,2398.5 4738.91,2398.5 4757.41,2417 v1(4969,2417)
  Bottom Layer w6: MCU1.30 4241.73,2491.27 4259,2474 4259,2460.96 4265.96,2454 4295.73,2454 4301,2448.73 4301,2448.53 v1(4319.08,2448.53) ; schmitt.4 4947,2288.46 4967,2308.46 4967,2415 v1(4969,2417)
NetMCU1_38: MCU1.38 MPU1.22 | length 765.2
  Top Layer w6: MPU1.22 4595.96,2713.62 4595.96,2734.43 4652,2734.43 4700,2686.43 v1(4700,2685)
  Horizontal w6: v1(4190,2735) 4334.59,2735 4346.09,2723.5 4383.91,2723.5 4406.91,2746.5 4638.5,2746.5 v1(4700,2685)
  Bottom Layer w6: MCU1.38 4166.1,2711.1 v1(4190,2735)
NetMCU1_39: MCU1.39 TF1.7 | length 639.6
  Top Layer w10: v1(4126.8,2932.36) 4167.36,2932.36 4231.14,2996.14 TF1.7
  Vertical w10: v1(4087.14,2730.79) 4126.8,2770.45 v1(4126.8,2932.36)
  Bottom Layer w10: v1(4087.14,2730.79) MCU1.39
NetMCU1_40: MCU1.40 TF1.8 | length 638.2
  Top Layer w10: v1(4146.5,2956.5) 4156.5,2956.5 4221.5,3021.5 4279.73,3021.5 4289.73,3031.5 4477.64,3031.5 TF1.8
  Vertical w10: v1(4146.5,2956.5) 4150.3,2952.7 4150.3,2819.7 v1(4190,2780)
  Bottom Layer w10: MCU1.40 4165.25,2750.47 4190,2775.23 v1(4190,2780)
NetMCU1_51: MCU1.51 TF1.1 | length 593.4
  Top Layer w10: v1(4216.66,2920) 4216.66,2773.34 4250,2740 4290,2740 4335,2695 4434.32,2695 4475.62,2736.3 TF1.1
  Bottom Layer w10: v1(4216.66,2920) 4238.95,2942.29 4238.95,3023.47 4230.83,3023.47 4238.95,3015.35 ; MCU1.51@4238.95,2981.6 MCU1.51
NetMCU1_52: MCU1.52 TF1.2 | length 376
  Top Layer w10: v1@4265,2855 v1(4265,2853.23) 4283.23,2835 4377.37,2835 4432.77,2779.61 TF1.2
  Bottom Layer w10: MCU1.52 4261.42,2924.65 4256.5,2919.73 4256.5,2861.73 v1(4265,2853.23)
NetMCU1_53: MCU1.53 TF1.5 | length 275.4
  Top Layer w10: v1(4280,2910) 4290,2920 4467.17,2920 TF1.5
  Bottom Layer w10: v1(4280,2910) 4281.1,2911.1 MCU1.53
NetMCU1_54: MCU1.54 TF1.3 | length 327.2
  Top Layer w10: v1(4315,2860) 4375,2860 4406.5,2828.5 4477.64,2828.5 TF1.3
  Bottom Layer w10: MCU1.54 4300.79,2922.45 4303.5,2919.73 4303.5,2850.89 4305,2849.39 4315,2859.39 v1(4315,2860)
NetMCU1_56: MCU1.56 R5.4 | length 742.2
  Vertical w10: v1(4105,2575) 4123.5,2593.5 4193.27,2593.5 4195.27,2591.5 4214.73,2591.5 4256.5,2633.27 4256.5,2670.64 4259.5,2673.64 4259.5,2741.27 4288.5,2770.27 4288.5,2868.5 4303.5,2883.5 4303.5,3018.5 v1(4340,3055)
  Bottom Layer w10: R5.4 4099.53,2569.53 v1(4105,2575) ; v1(4340,3055) 4340.16,3054.84 MCU1.56
NetMCU1_57: MCU1.57 R6.1 | length 597.3
  Vertical w10: v1(4314,2479.53) 4314,2769 4345,2800 v1(4345,2805)
  Bottom Layer w6: v1(4314,2479.53) 4320.07,2479.53 4371.99,2427.61 R6.1
  Bottom Layer w10: v1(4345,2805) 4345,2930 MCU1.57@4359.84,2944.84
NetMCU1_58: MCU1.58 R6.2 | length 636
  Top Layer w10: v1(4345,2485) 4347.98,2485 4356.08,2476.9
  Vertical w10: v1(4345,2485) 4345,2735 v1(4355,2745)
  Bottom Layer w6: v1(4345,2485) 4377,2453 4416,2453 4425.16,2443.84 R6.2
  Bottom Layer w10: v1(4355,2745) 4371.5,2761.5 4371.5,2896.5 4379.53,2904.53 MCU1.58
NetMCU1_59: MCU1.59 R6.3 | length 606.3
  Top Layer w10: v1(4379.52,2486.69) v1@4383.31,2486.69
  Vertical w10: v1(4379.52,2486.69) 4379.52,2759.52 v1(4395,2775)
  Bottom Layer w6: v1(4379.52,2486.69) 4400.22,2466 4427,2466 4444.84,2448.16 R6.3
  Bottom Layer w10: v1@4379.52,2486.29 v1(4379.52,2486.69) ; v1(4395,2775) 4399.21,2779.21 MCU1.59
NetMCU1_60: MCU1.60 R3.2 | length 65.1
  Bottom Layer w10: MCU1.60 R3.2@4418.9,3043.9
NetMCU1_61: MCU1.61 R6.4 | length 632
  Vertical w10: v1(4427.64,2896.2) 4453.08,2870.77 4453.08,2486.93 v1(4510.42,2429.58)
  Bottom Layer w10: v1(4427.64,2896.2) 4438.58,2907.14 MCU1.61 ; R6.4@4466.5,2429.58 v1(4510.42,2429.58)
NetPPM1_3: PPM1.3 R5.8 | length 268.5
  Bottom Layer w6: R5.8 4040.47,2374.53 4119.69,2295.32 PPM1.3
NetR5_5: R5.5 RC1.2 | length 390.8
  Bottom Layer w6: R5.5 4099.53,2406.47 4159.69,2346.32 4176.12,2346.32 4188.12,2334.32 4271.15,2334.32 4310.15,2295.32 RC1.2
NetR5_6: R5.6 RC1.1 | length 317.1
  Bottom Layer w6: R5.6 4079.84,2395.16 4140.69,2334.32 4171.15,2334.32 4210.15,2295.32 RC1.1
NetR6_5: R6.5 RC1.6 | length 324.9
  Bottom Layer w6: R6.5 4572.22,2378.39 4613.83,2336.79 4713.53,2336.79 RC1.6
NetR6_6: R6.6 RC1.5 | length 254.5
  Bottom Layer w6: R6.6 4444.84,2361.47 4456,2350.32 4555.15,2350.32 4610.15,2295.32 RC1.5
NetR6_7: R6.7 RC1.4 | length 177.5
  Bottom Layer w10: R6.7 4425.16,2355.84 4444.69,2336.32 4471.98,2336.32 4512.98,2295.32 RC1.4
NetR6_8: R6.8 RC1.3 | length 103.6
  Bottom Layer w6: R6.8 4405.47,2344.84 RC1.3
NetR8_2: R8.2 U1.3 | length 98.7
  Top Layer w6: R8.2 4534,3094.18 U1.3
NetR9_2: R9.2 U2.3 | length 59.2
  Top Layer w6: R9.2 4233,2372 U2.3
USB_N: MCU1.44 USB1.2 | length 1841.3
  Top Layer w15: USB1.2 4900.5,2209.32 v1(4905,2204.82)
  Vertical w15: v1(4775,2940) 4810,2905 4810,2514.64 4880,2444.64 4880,2257.24 4875,2252.24 4875,2227.39 4897.57,2204.82 v1(4905,2204.82)
  Horizontal w15: v1(4045.25,2825.25) 4050.5,2820 4195,2820 4264.12,2889.12 4269.23,2884 4290.77,2884 4306,2899.23 4306,2920.77 4300.88,2925.88 4315,2940 4504.54,2940 4514.91,2929.63 4597.86,2929.63 4589,2920.77 4589,2899.23 4604.23,2884 4625.77,2884 4641,2899.23 4641,2920.77 4639.64,2922.13 4669.25,2922.13 4687.12,2940 v1(4775,2940)
  Bottom Layer w10: v1(4045.25,2825.25) 4048,2822.5 4081.39,2822.5 4088.1,2829.21 MCU1.44
USB_P: MCU1.45 USB1.3 | length 1689.2
  Top Layer w15: USB1.3 4900.5,2235.32 v1(4905,2239.82)
  Vertical w15: v1(4799.75,2964.75) 4835,2929.5 4835,2525 4905,2455 v1(4905,2239.82)
  Horizontal w15: v1(4070,2850) 4071.89,2848.11 4187.75,2848.11 4254,2914.36 4254,2920.77 4269.23,2936 4275.64,2936 4309.64,2970 4509.9,2970 4525.26,2954.63 4609.97,2954.63 4617.47,2947.13 4658.9,2947.13 4681.76,2970 4794.5,2970 v1(4799.75,2964.75)
  Bottom Layer w10: v1(4070,2850) 4071.1,2848.9 MCU1.45
VBAT: Bat1.1 R7.1 R11.1 U$1.3 | length 333.1
  Bottom Layer w10: U$1.3 R11.1@4443,3338.32 ; R11.1 R7.1@4552.36,3345.32
  Bottom Layer w80: R7.1@4570,3362.95 4602.95,3330 Bat1.1
VSYS: *1.4 C24.1 Motor1.1 R7.2 R12.2 U$1.4 | length 655.9
  Bottom Layer w10: U$1.4 4499.05,3178 R7.2@4570,3107.05 ; C24.1@4820,3010 C24.1@4820,3015 ; C24.1@4830,3015 4837.5,3022.5 R12.2 ; R12.2@4895,2975 *1.4
  Bottom Layer w20: Motor1.1 4730,3105 4756.5,3078.5 4756.81,3078.5 4820,3015.3 C24.1@4820,3015
  Bottom Layer w80: R7.2@4570,3107.05 4697.05,3107.05 Motor1.1
pads on no net: ADC1.2 Baro1.4 debug1.shell GPS1.shell MCU1.2 MCU1.3 MCU1.4 MCU1.8 MCU1.9 MCU1.10 MCU1.11 MCU1.14 MCU1.15 MCU1.17 MCU1.20 MCU1.29 MCU1.33 MCU1.34 MCU1.41 MCU1.42 MCU1.43 MCU1.50 MCU1.62 MPU1.1 MPU1.2 MPU1.3 MPU1.4 MPU1.5 MPU1.6 MPU1.7 MPU1.11 MPU1.14 MPU1.15 MPU1.16 MPU1.17 MPU1.19 MPU1.21 schmitt.1 TF1.9 USB1.4

## Polygon pours and split planes (outlines as drawn)
GND on Vertical "Top Layer-No Net" (solid, pour order 4): 5020,3425 4015.75,3425 4015.75,2050 5020,2050
GND on Horizontal "Top Layer-No Net" (solid, pour order 6): 5010,3415 4025,3415 4025,2030 4045,2050 5030,2050
GND on Bottom Layer "Top Layer-No Net" (solid, pour order 8): 5020,3425 4020,3425 4015.75,3420.75 4015.75,2050 5020,2050
GND on Top Layer "Top Layer-No Net" (solid, pour order 10): 5020,3425 4010,3425 4010,2055.75 4015.75,2050 5020,2050

## Keep-outs
Keep-Out Layer:
  lines w10: 4000,2050 5020,2050 5020,3425 4000,3425 4000,2050

## Text inside footprints (layer, text, board x,y; h text height)
Bat1: Top Overlay "+" at 4640,3410 h35
Motor1: Top Overlay "+" at 4640,3220 h35
R5: Mechanical 1 "R1" at 4077.84,2513.23 h11.81
R6: Mechanical 1 "R1" at 4442.84,2395.91 h11.81